# EAGLE board Board (EAGLE 9.7.0)
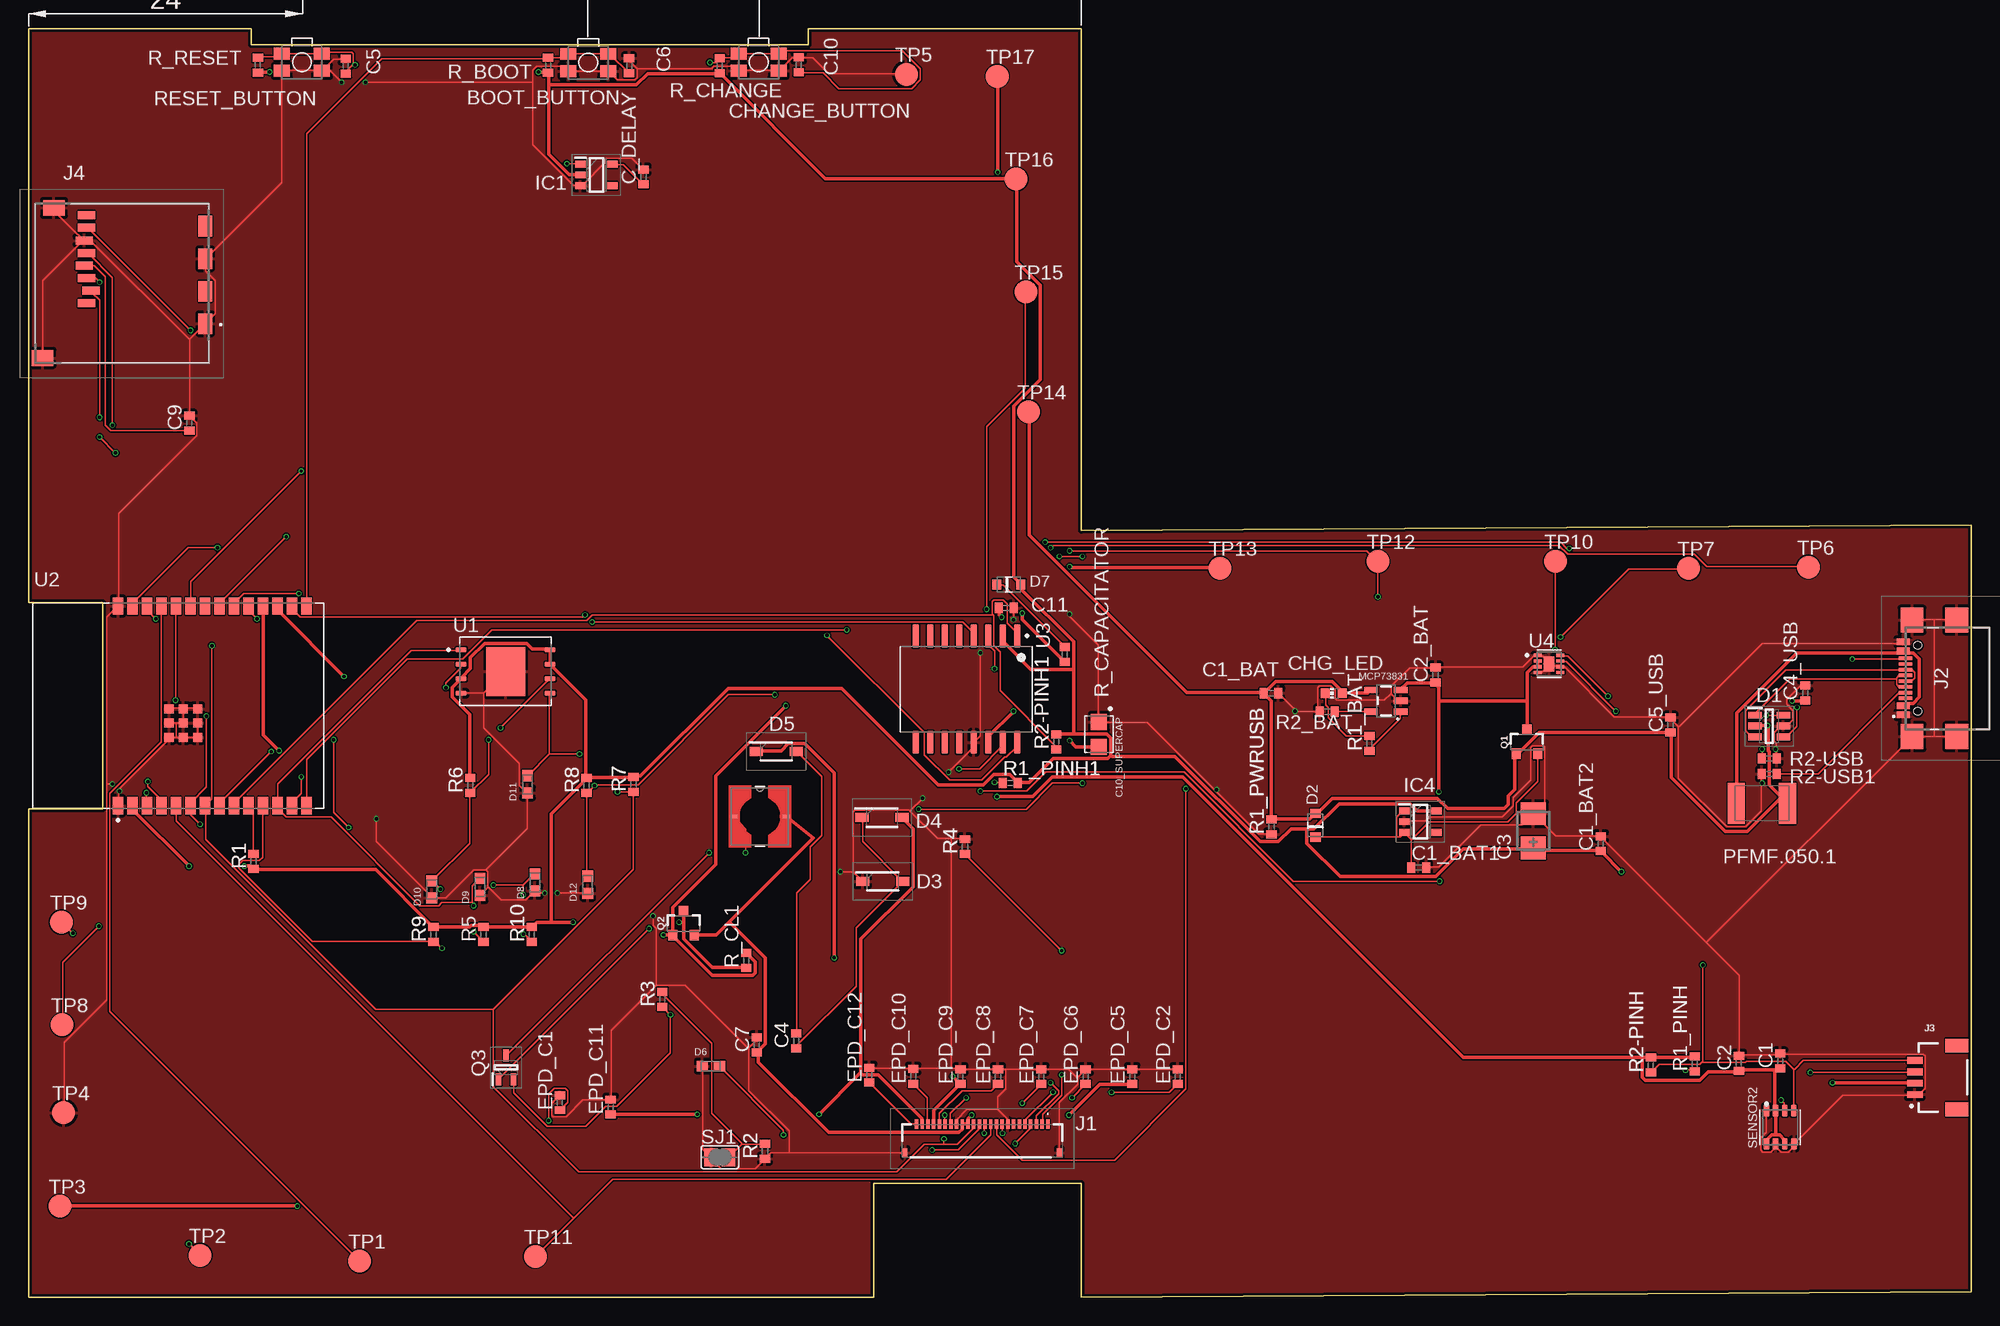
[diagram p0: board, top side]
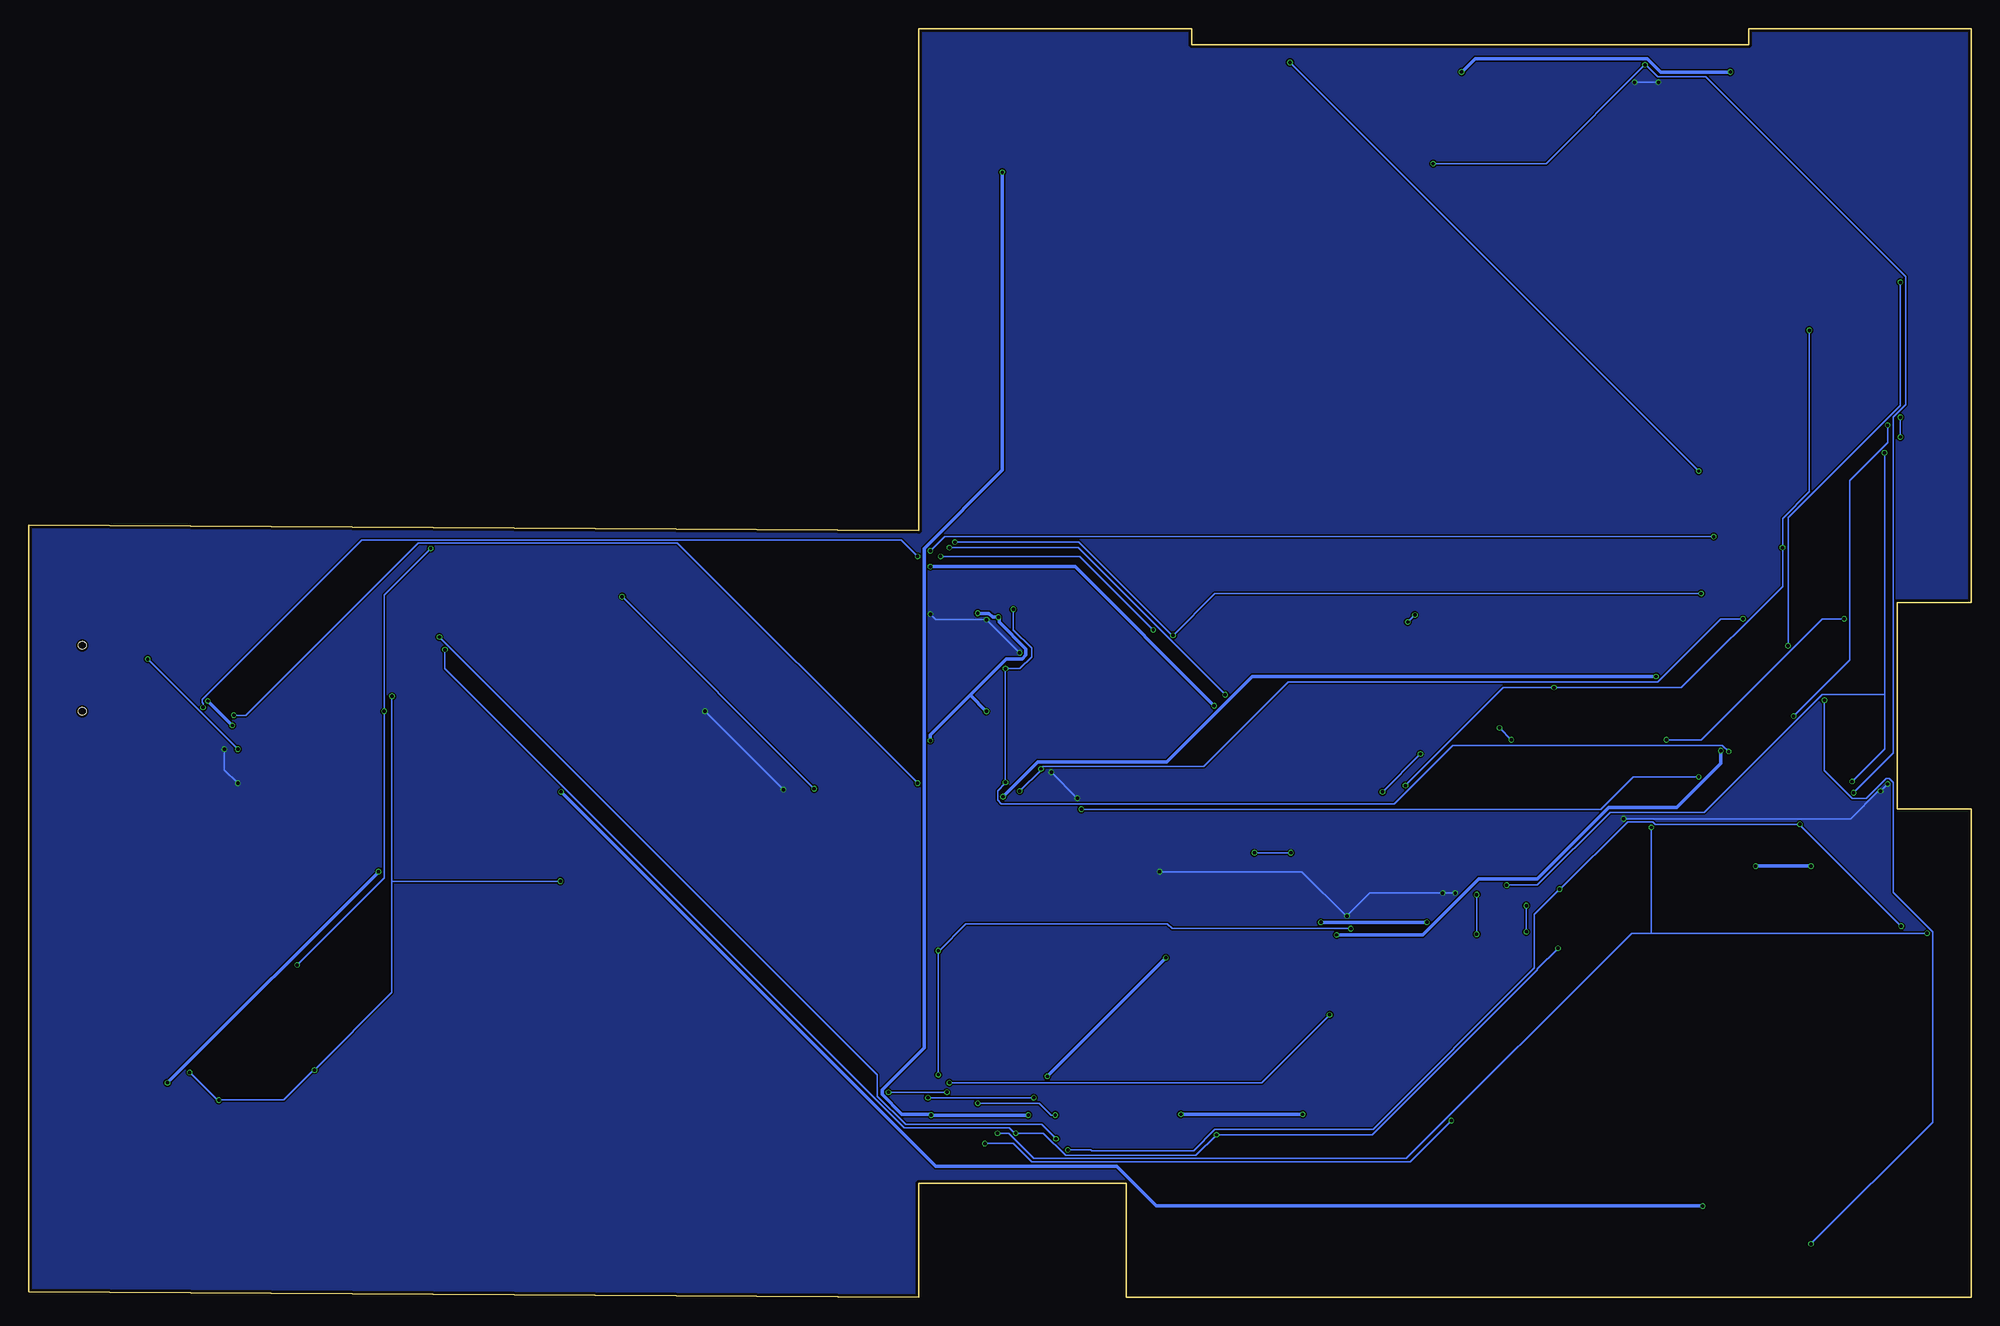
[diagram p1: board, bottom side, seen from below]

Size 170.2 x 111.2 mm. Coordinates in mm from the lower left corner, seen from the top.
Outline: 0,111.2 19.5,111.2 19.5,109.8 68.3,109.8 68.3,111.2 92.2,111.2 92.2,67.2 170.2,67.7 170.2,0.5 92.2,0 92.2,10 74.04,10 74.04,0 0,0 0,42.8 6.5,42.8 6.5,60.9 0,60.9 0,111.2
Copper layers (1*16): Top 0.035mm / dielectric 1.6mm / Bottom 0.035mm
Design rules "jlcpcb-2layers.dru": minimum track width 0.15mm, minimum drill 0.3mm, track to track 5mil, track to pad 5mil, pad to pad 5mil, via to via 5mil, smd to smd 5mil, copper to edge 0.2mm, drill to drill 6mil, minimum pad ring 10mil, minimum via ring 3mil, stop-mask expansion 4mil, vias tented up to drill 0mil, thermal gap 10mil
Net classes: 1 TSC: width 0.3 mm

## Footprints (pad centres in the part's own frame; a part is rotated, then mirrored left to right if it is on the bottom)
MYBUTTON = smd 1.4 x 1.05: 1 1.75,0.75; 2 -1.75,0.75; 3 -1.75,-0.75; 4 1.75,-0.75
EAGLE-LTSPICE_C0402 = smd 0.7 x 0.9: 1 -0.65,0; 2 0.65,0
ESP32_WROVER_EAGLE-LTSPICE_C0402 = smd 0.7 x 0.9: 1 -0.65,0; 2 0.65,0
RCL_CT3528 = smd 2 x 2.2: + -1.5,0; - 1.5,0
CAPCP3225X100N = smd 1.4 x 1.4: 1 -1.1,0; 2 1.1,0
ADAFRUIT_CHIP-LED0603 = smd 0.8 x 0.8: A 0,-0.75; C 0,0.75
SOT95P280X145-6N = smd 1.2 x 0.6: 1 -1.25,0.95; 2 -1.25,0; 3 -1.25,-0.95; 4 1.25,-0.95; 5 1.25,0; 6 1.25,0.95
ESP32_WROVER_AVX---SD0805S020S1R0_AVX_SD0805S020S1R0_0 = smd 0.8 x 0.9: 1 -1.05,0; 2 1.05,0
SOD3716X135N = smd 1.15 x 0.8: 1 -1.75,0; 2 1.75,0
DIOC1608X36N = smd 0.97 x 0.94: 1 -0.75,0; 2 0.75,0
SOT95P280X125-5N = smd 0.9 x 0.6: 1 -1.4,0.95; 2 -1.4,0; 3 -1.4,-0.95; 4 1.4,-0.95; 5 1.4,0.95
SOT95P280X120-5N = smd 0.9 x 0.6: 1 -1.4,0.95; 2 -1.4,0; 3 -1.4,-0.95; 4 1.4,-0.95; 5 1.4,0.95
FH34SRJ24S05SH99 = smd 0.3 x 0.8: 1 5.75,1.45; 2 5.25,1.45; 3 4.75,1.45; 4 4.25,1.45; 5 3.75,1.45; 6 3.25,1.45; 7 2.75,1.45; 8 2.25,1.45; 9 1.75,1.45; 10 1.25,1.45; 11 0.75,1.45; 12 0.25,1.45; 13 -0.25,1.45; 14 -0.75,1.45; 15 -1.25,1.45; 16 -1.75,1.45; 17 -2.25,1.45; 18 -2.75,1.45; 19 -3.25,1.45; 20 -3.75,1.45; 21 -4.25,1.45; 22 -4.75,1.45; 23 -5.25,1.45; 24 -5.75,1.45 | smd 0.4 x 0.8: MP1 6.75,-1.05; MP2 -6.75,-1.05
SAMACSYS_PARTS_USB4110GFA = smd 0.3 x 1.15: A1 -3.35,3.878; A4 -2.55,3.878; A5 -1.25,3.678; A6 -0.25,3.678; A7 0.25,3.678; A8 1.25,3.678; A9 2.55,3.878; A12 3.35,3.878; B1 3.05,3.878; B4 2.25,3.878; B5 1.75,3.678; B6 0.75,3.678; B7 -0.75,3.678; B8 -1.75,3.678; B9 -2.25,3.878; B12 -3.05,3.878 | smd 2.18 x 2: MP1 -5.11,-0.827; MP2 5.11,-0.827; MP3 -5.11,3.103; MP4 5.11,3.103 | hole 0.65: -2.89,2.603; 2.89,2.603
JST04_1MM_RA = smd 0.6 x 1.35: 1 -1.5,0; 2 -0.5,0; 3 0.5,0; 4 1.5,0 | smd 1.2 x 2: NC1 2.8,-3.675; NC2 -2.8,-3.675
112ATAARR03ATTEND = smd 1.8 x 1.2: G1 10.6,10.4; G2 4.9,10.4; S1 7.75,10.4; S2 2.05,10.4 | smd 1.4 x 1.9: G3 13.6,-3.85; G4 0.45,-2.85 | smd 0.7 x 1.5: P1 8.8,0; P2 7.7,0.4; P3 6.6,0; P4 5.5,-0.2; P5 4.4,0; P6 3.3,-0.2; P7 2.2,0; P8 1.1,0
IND_4828-WE-TPC_WRE = smd 0.61 x 0.305: 1 -2.286,0; 2 2.286,0
ESP32_WROVER_SPARKFUN-IC-POWER_SOT23-5 = smd 0.55 x 1.2: 1 -0.95,-1.3; 2 0,-1.3; 3 0.95,-1.3; 4 0.95,1.3; 5 -0.95,1.3
ESP32C6_VARISTOR_CT/CN1812 = smd 1.5 x 3.6: 1 -2.25,0; 2 2.25,0
ESP32_WROVER_SPARKFUN-DISCRETESEMI_SOT23-3 = smd 0.8 x 0.9: 1 -0.95,-1; 2 0.95,-1; 3 0,1.1
SOT65P210X110-3N = smd 1.05 x 0.5: 1 -1.05,0.65; 2 -1.05,-0.65; 3 1.05,0
ESP32_WROVER_EAGLE-LTSPICE_R0402 = smd 0.7 x 0.9: 1 -0.65,0; 2 0.65,0
ESP32_WROVER_BME680_PSON80P300X300X100-8N = smd 1.016 x 0.5: 1 1.458,1.2; 2 1.458,0.4; 3 1.458,-0.4; 4 1.458,-1.2; 5 -1.458,-1.22; 6 -1.458,-0.4; 7 -1.458,0.4; 8 -1.458,1.2
SJ = smd 1.168 x 1.6: 1 -0.762,0; 2 0.762,0
TP20R = smd 2 x 2: TP 0,0
SON127P600X800X80-9N = smd 0.94 x 0.44: 1 -3.895,1.905; 2 -3.895,0.635; 3 -3.895,-0.635; 4 -3.895,-1.905; 5 3.895,-1.905; 6 3.895,-0.635; 7 3.895,0.635; 8 3.895,1.905 | smd 3.4 x 4.3: 9 0,0
XCVR_ESP32-C6-WROOM-1-N8 = smd 1.5 x 0.9: 1 -8.75,5.26; 2 -8.75,3.99; 3 -8.75,2.72; 4 -8.75,1.45; 5 -8.75,0.18; 6 -8.75,-1.09; 7 -8.75,-2.36; 8 -8.75,-3.63; 9 -8.75,-4.9; 10 -8.75,-6.17; 11 -8.75,-7.44; 12 -8.75,-8.71; 13 -8.75,-9.98; 14 -8.75,-11.25; 15 8.75,-11.25; 16 8.75,-9.98; 17 8.75,-8.71; 18 8.75,-7.44; 19 8.75,-6.17; 20 8.75,-4.9; 21 8.75,-3.63; 22 8.75,-2.36; 23 8.75,-1.09; 24 8.75,0.18; 25 8.75,1.45; 26 8.75,2.72; 27 8.75,3.99; 28 8.75,5.26 | smd 0.8 x 0.8: 29_1 -2.755,0.79; 29_2 -1.505,0.79; 29_3 -0.255,0.79; 29_4 -2.755,-0.46; 29_5 -1.505,-0.46; 29_6 -0.255,-0.46; 29_7 -2.755,-1.71; 29_8 -1.505,-1.71; 29_9 -0.255,-1.71
SOIC127P1032X265-16N = smd 2.05 x 0.59: 1 -4.655,4.445; 2 -4.655,3.175; 3 -4.655,1.905; 4 -4.655,0.635; 5 -4.655,-0.635; 6 -4.655,-1.905; 7 -4.655,-3.175; 8 -4.655,-4.445; 9 4.655,-4.445; 10 4.655,-3.175; 11 4.655,-1.905; 12 4.655,-0.635; 13 4.655,0.635; 14 4.655,1.905; 15 4.655,3.175; 16 4.655,4.445
SON50P200X200X80-9N = smd 0.76 x 0.27: 1 -0.985,0.75; 2 -0.985,0.25; 3 -0.985,-0.25; 4 -0.985,-0.75; 5 0.985,-0.75; 6 0.985,-0.25; 7 0.985,0.25; 8 0.985,0.75 | smd 0.9 x 1.3: 9 0,0

## Placement (x,y rotation side)
BOOT_BUTTON  BUTTON_CUSYOMV1  [MYBUTTON]  49.03,108.22 180 top
C1  100nF  [EAGLE-LTSPICE_C0402]  153.45,20.73 90 top
C1_BAT  4.7uF  [EAGLE-LTSPICE_C0402]  108.84,52.95 0 top
C1_BAT1  4.7uF  [EAGLE-LTSPICE_C0402]  121.78,37.67 0 top
C1_BAT2  4.7uF  [ESP32_WROVER_EAGLE-LTSPICE_C0402]  137.72,39.77 90 top
C2  100nF  [EAGLE-LTSPICE_C0402]  149.83,20.53 90 top
C2_BAT  4.7uF  [ESP32_WROVER_EAGLE-LTSPICE_C0402]  123.25,54.55 90 top
C3  100uF TANT  [RCL_CT3528]  131.81,40.9 90 top
C4  4.7uF/25V  [ESP32_WROVER_EAGLE-LTSPICE_C0402]  67.25,22.49 90 top
C4_USB  100nF  [EAGLE-LTSPICE_C0402]  155.63,52.97 90 top
C5  1uF  [EAGLE-LTSPICE_C0402]  27.79,107.91 90 top
C5_USB  4.7uF  [EAGLE-LTSPICE_C0402]  143.84,50.17 90 top
C6  100nF  [EAGLE-LTSPICE_C0402]  52.61,107.93 90 top
C7  10uF  [EAGLE-LTSPICE_C0402]  63.8,22.13 90 top
C9  100nF  [ESP32_WROVER_EAGLE-LTSPICE_C0402]  14.09,76.63 90 top
C10  100nF  [EAGLE-LTSPICE_C0402]  67.47,108.03 90 top
C10_SUPERCAP  CPH3225A  [CAPCP3225X100N]  93.76,49.34 270 top
C11  100nF  [ESP32_WROVER_EAGLE-LTSPICE_C0402]  85.65,60.43 0 top
C_DELAY  100nF  [EAGLE-LTSPICE_C0402]  53.87,98.19 90 top
CHANGE_BUTTON  BUTTON_CUSYOMV1  [MYBUTTON]  63.96,108.25 180 top
CHG_LED  [ADAFRUIT_CHIP-LED0603]  114.34,52.95 90 top
D1  USBLC6-2SC6Y  [SOT95P280X145-6N]  152.48,50.07 0 top
D2  ESP32_WROVER_AVX---SD0805S020S1R0_AVX_SD0805S020S1R0_0_0AVX_SD0805S020S1R0_0_0  [ESP32_WROVER_AVX---SD0805S020S1R0_AVX_SD0805S020S1R0_0]  112.73,41.38 90 top
D3  MBR0530  [SOD3716X135N]  74.82,36.45 0 top
D4  MBR0530  [SOD3716X135N]  74.76,42.05 0 top
D5  MBR0530  [SOD3716X135N]  65.5,47.85 0 top
D6  PGB1010603MR  [DIOC1608X36N]  59.78,20.27 0 top
D7  ESP32_WROVER_AVX---SD0805S020S1R0_AVX_SD0805S020S1R0_0_0AVX_SD0805S020S1R0_0_0  [ESP32_WROVER_AVX---SD0805S020S1R0_AVX_SD0805S020S1R0_0]  85.88,62.48 0 top
D8  PGB1010603MR  [DIOC1608X36N]  44.36,36.37 90 top
D9  PGB1010603MR  [DIOC1608X36N]  39.54,35.97 90 top
D10  PGB1010603MR  [DIOC1608X36N]  35.32,35.77 90 top
D11  PGB1010603MR  [DIOC1608X36N]  43.7,44.97 90 top
D12  PGB1010603MR  [DIOC1608X36N]  48.98,36.17 90 top
EPD_C1  1uF/50V  [EAGLE-LTSPICE_C0402]  46.55,17.07 90 top
EPD_C2  1uF/50V  [EAGLE-LTSPICE_C0402]  100.68,19.35 90 top
EPD_C5  1uF/50V  [EAGLE-LTSPICE_C0402]  96.69,19.35 90 top
EPD_C6  1uF/50V  [EAGLE-LTSPICE_C0402]  92.6,19.35 90 top
EPD_C7  1uF/50V  [EAGLE-LTSPICE_C0402]  88.71,19.35 90 top
EPD_C8  1uF/50V  [EAGLE-LTSPICE_C0402]  84.92,19.35 90 top
EPD_C9  1uF/50V  [EAGLE-LTSPICE_C0402]  81.63,19.35 90 top
EPD_C10  1uF/50V  [EAGLE-LTSPICE_C0402]  77.51,19.39 90 top
EPD_C11  1uF/50V  [EAGLE-LTSPICE_C0402]  50.99,16.69 90 top
EPD_C12  1uF/50V  [EAGLE-LTSPICE_C0402]  73.65,19.49 90 top
IC1  BD5229G-TR  [SOT95P280X125-5N]  49.75,98.37 0 top
IC4  XC6220A331MR-G  [SOT95P280X120-5N]  121.93,41.69 0 top
J1  FH34SRJ-24S-0.5SH_99_  [FH34SRJ24S05SH99]  83.54,13.74 0 top
J2  SAMACSYS_PARTS_USB4110-GF-A  [SAMACSYS_PARTS_USB4110GFA]  168.1,54.26 90 top
J3  QWIIC_RIGHT_ANGLE  [JST04_1MM_RA]  165.25,19.28 90 top
J4  112A-TAAR-R03_ATTEND  [112ATAARR03ATTEND]  5.08,95.93 270 top
L1  68uH  [IND_4828-WE-TPC_WRE]  64.07,42.15 0 top
MCP73831  ESP32_WROVER_SPARKFUN-IC-POWER_MCP73831  [ESP32_WROVER_SPARKFUN-IC-POWER_SOT23-5]  118.91,52.29 90 top
PFMF.050.1  ESP32C6_VARISTORCN1812  [ESP32C6_VARISTOR_CT/CN1812]  151.84,43.3 0 top
Q1  20V/4.2A/52mΩ/1.4W  [ESP32_WROVER_SPARKFUN-DISCRETESEMI_SOT23-3]  131.26,48.66 0 top
Q2  20V/4.2A/52mΩ/1.4W  [ESP32_WROVER_SPARKFUN-DISCRETESEMI_SOT23-3]  57.38,32.76 0 top
Q3  SI1308EDL-T1-GE3  [SOT65P210X110-3N]  41.83,20.15 90 top
R1  10K  [ESP32_WROVER_EAGLE-LTSPICE_R0402]  19.71,38.21 90 top
R1_BAT  200  [ESP32_WROVER_EAGLE-LTSPICE_R0402]  117.46,48.55 90 top
R1_PINH  10K  [ESP32_WROVER_EAGLE-LTSPICE_R0402]  145.96,20.47 90 top
R1_PINH1  10K  [ESP32_WROVER_EAGLE-LTSPICE_R0402]  86.01,45.09 0 top
R1_PWRUSB  100K  [ESP32_WROVER_EAGLE-LTSPICE_R0402]  108.88,41.24 90 top
R2  2.2  [ESP32_WROVER_EAGLE-LTSPICE_R0402]  64.51,12.81 90 top
R2-PINH  10K  [ESP32_WROVER_EAGLE-LTSPICE_R0402]  142.12,20.37 90 top
R2-PINH1  10K  [ESP32_WROVER_EAGLE-LTSPICE_R0402]  90.03,48.69 90 top
R2-USB  5k1  [ESP32_WROVER_EAGLE-LTSPICE_R0402]  152.49,47.23 0 top
R2-USB1  5k1  [ESP32_WROVER_EAGLE-LTSPICE_R0402]  152.5,45.87 0 top
R2_BAT  2K  [ESP32_WROVER_EAGLE-LTSPICE_R0402]  113.78,51.33 0 top
R3  0.47  [ESP32_WROVER_EAGLE-LTSPICE_R0402]  55.52,26.13 90 top
R4  10K  [ESP32_WROVER_EAGLE-LTSPICE_R0402]  82.03,39.51 90 top
R5  10K  [ESP32_WROVER_EAGLE-LTSPICE_R0402]  39.85,31.81 90 top
R6  10K  [ESP32_WROVER_EAGLE-LTSPICE_R0402]  38.7,44.87 90 top
R7  10K  [ESP32_WROVER_EAGLE-LTSPICE_R0402]  52.99,44.97 90 top
R8  10K  [ESP32_WROVER_EAGLE-LTSPICE_R0402]  48.88,44.87 90 top
R9  10K  [ESP32_WROVER_EAGLE-LTSPICE_R0402]  35.47,31.81 90 top
R10  10K  [ESP32_WROVER_EAGLE-LTSPICE_R0402]  44.09,31.81 90 top
R_BOOT  10K  [ESP32_WROVER_EAGLE-LTSPICE_R0402]  45.51,107.97 90 top
R_CAPACITATOR  15  [ESP32_WROVER_EAGLE-LTSPICE_R0402]  90.78,56.34 90 top
R_CHANGE  10K  [ESP32_WROVER_EAGLE-LTSPICE_R0402]  60.55,107.94 90 top
R_CL1  10K  [ESP32_WROVER_EAGLE-LTSPICE_R0402]  62.87,29.53 90 top
R_RESET  10K  [ESP32_WROVER_EAGLE-LTSPICE_R0402]  20.09,107.99 90 top
RESET_BUTTON  BUTTON_CUSYOMV1  [MYBUTTON]  23.95,108.25 180 top
SENSOR2  ESP32_WROVER_BME680_BME680  [ESP32_WROVER_BME680_PSON80P300X300X100-8N]  153.44,14.92 90 top
SJ1  [SJ]  60.56,12.29 0 top
TP1  TPTP20R  [TP20R]  29.01,3.19 0 top
TP2  TPTP20R  [TP20R]  15.03,3.69 0 top
TP3  TPTP20R  [TP20R]  2.75,7.99 0 top
TP4  TPTP20R  [TP20R]  3.07,16.19 0 top
TP5  TPTP20R  [TP20R]  76.89,107.19 0 top
TP6  TPTP20R  [TP20R]  155.91,63.99 0 top
TP7  TPTP20R  [TP20R]  145.43,63.89 0 top
TP8  TPTP20R  [TP20R]  2.95,23.89 0 top
TP9  TPTP20R  [TP20R]  2.87,32.89 0 top
TP10  TPTP20R  [TP20R]  133.76,64.51 0 top
TP11  TPTP20R  [TP20R]  44.39,3.59 0 top
TP12  TPTP20R  [TP20R]  118.21,64.51 0 top
TP13  TPTP20R  [TP20R]  104.36,63.91 0 top
TP14  TPTP20R  [TP20R]  87.61,77.61 0 top
TP15  TPTP20R  [TP20R]  87.36,88.11 0 top
TP16  TPTP20R  [TP20R]  86.51,98.01 0 top
TP17  TPTP20R  [TP20R]  84.86,107.01 0 top
U1  W25Q512JVEIQ  [SON127P600X800X80-9N]  41.79,54.86 0 top
U2  ESP32-C6-WROOM-1-N8  [XCVR_ESP32-C6-WROOM-1-N8]  13.1,51.84 90 top
U3  DS3231SN#  [SOIC127P1032X265-16N]  82.15,53.3 270 top
U4  MAX17048G+T10  [SON50P200X200X80-9N]  133.2,55.52 0 top

## Library data of the parts
BOOT_BUTTON CHANGE_BUTTON CHG_LED PFMF.050.1 RESET_BUTTON SJ1 TP1-TP17 = DeskAssistant v19 v1
C1 C1_BAT C1_BAT1 C1_BAT2 C2 C2_BAT C4 C4_USB C5 C5_USB C6 C7 C9-C11 C_DELAY EPD_C1 EPD_C2 EPD_C5-EPD_C12 = DeskAssistant v19 v1; SPICEMODEL: NONE; SPICEPREFIX: C
C3 = DeskAssistant v19 v1; SPICEPREFIX: C
C10_SUPERCAP = DeskAssistant v19 v1; AVAILABILITY: Not in stock; CHECK_PRICES: https://www.snapeda.com/parts/CPH3225A/Seiko+Instruments/view-part/?ref=eda; DESCRIPTION: 11 mF (EDLC) Supercapacitor 3.3 V 1210 (3225 Metric) - -; MF: Seiko Instruments; MP: CPH3225A; PACKAGE: 1210 Seiko; PRICE: None; PURCHASE-URL: https://www.snapeda.com/api/url_track_click_mouser/?unipart_id=562593&manufacturer=Seiko Instruments&part_name=CPH3225A&search_term=None; SNAPEDA_LINK: https://www.snapeda.com/parts/CPH3225A/Seiko+Instruments/view-part/?ref=snap
D1 = DeskAssistant v19 v1; AVAILABILITY: In Stock; CHECK_PRICES: https://www.snapeda.com/parts/USBLC6-2SC6Y/STMicroelectronics/view-part/?ref=eda; DESCRIPTION: 17V Clamp 5A (8/20µs) Ipp Tvs Diode Surface Mount SOT-23-6; MF: STMicroelectronics; MP: USBLC6-2SC6Y; PACKAGE: SOT-23-6 STMicroelectronics; PRICE: None; SNAPEDA_LINK: https://www.snapeda.com/parts/USBLC6-2SC6Y/STMicroelectronics/view-part/?ref=snap
D2 D7 = DeskAssistant v19 v1; CENTROID_NOT_SPECIFIED: No; DATASHEET: http://datasheets.avx.com/schottky.pdf; DIGIKEY_DESCRIPTION: DIODE SCHOTTKY 20V 1A 0805; DIGIKEY_PART_NUMBER: 478-7800-1-ND; LEAD_FREE: yes; MF: AVX; MOUSER_PART_NUMBER: 581-SD0805S020S1R0; PACKAGE: 0805 (2012 metric); PREFIX: D; ROHS: yes; TEMPERATURE_RANGE_HIGH: +125°C; TEMPERATURE_RANGE_LOW: -55°C
D3-D5 = DeskAssistant v19 v1; AVAILABILITY: In Stock; CHECK_PRICES: https://www.snapeda.com/parts/MBR0530/Onsemi/view-part/?ref=eda; DESCRIPTION: Diode Schottky 30 V 500mA Surface Mount SOD-123; MF: ON Semiconductor; MP: MBR0530; PACKAGE: SOD-123-2 ON Semiconductor; PRICE: None; PURCHASE-URL: https://www.snapeda.com/api/url_track_click_mouser/?unipart_id=179458&manufacturer=ON Semiconductor&part_name=MBR0530&search_term=None; SNAPEDA_LINK: https://www.snapeda.com/parts/MBR0530/Onsemi/view-part/?ref=snap
D6 D8-D12 = DeskAssistant v19 v1; AVAILABILITY: In Stock; CHECK_PRICES: https://www.snapeda.com/parts/PGB1010603MR/Littelfuse/view-part/?ref=eda; DESCRIPTION: 150V (Typ) Clamp - Ipp Tvs Diode Surface Mount 0603 (1608 Metric); MF: Littelfuse Inc.; MP: PGB1010603MR; PACKAGE: 0603 Littelfuse Inc.; PRICE: None; PURCHASE-URL: https://www.snapeda.com/api/url_track_click_mouser/?unipart_id=5659453&manufacturer=Littelfuse Inc.&part_name=PGB1010603MR&search_term=None; SNAPEDA_LINK: https://www.snapeda.com/parts/PGB1010603MR/Littelfuse/view-part/?ref=snap
IC1 = DeskAssistant v19 v1; DESCRIPTION: Voltage Detector with Adjustable Delay Time: CMOS processes are utilized to develop high precision, low current consumption CMOS reset ICs that allow arbitrary setting of the delay time. The extensive lineup includes both Nch Open Drain and CMOS output types in a wide range of detection voltages (from 2.3V to 6.0V, in 0.1V steps), enabling selection of the ideal solution based on customer requirements. In addition, the entire series is of course both lead-free and RoHS-compliant.; HEIGHT: 1.25mm; MANUFACTURER_NAME: ROHM Semiconductor; MANUFACTURER_PART_NUMBER: BD5229G-TR; MOUSER_PART_NUMBER: 755-BD5229G-TR; MOUSER_PRICE-STOCK: https://www.mouser.co.uk/ProductDetail/ROHM-Semiconductor/BD5229G-TR?qs=4kLU8WoGk0vvnhrrYwdszw%3D%3D
IC4 = DeskAssistant v19 v1; DESCRIPTION: LDO Voltage Regulators; HEIGHT: 1.2mm; MANUFACTURER_NAME: Torex; MANUFACTURER_PART_NUMBER: XC6220A331MR-G; MOUSER_PART_NUMBER: 865-XC6220A331MR-G; MOUSER_PRICE-STOCK: https://www.mouser.co.uk/ProductDetail/Torex-Semiconductor/XC6220A331MR-G?qs=AsjdqWjXhJ8ZSWznL1J0gg%3D%3D
J1 = DeskAssistant v19 v1; DESCRIPTION: 24 Position FFC, FPC Connector Contacts, Top and Bottom 0.020" (0.50mm) Surface Mount, Right Angle; HEIGHT: 1.1mm; MANUFACTURER_NAME: Hirose; MANUFACTURER_PART_NUMBER: FH34SRJ-24S-0.5SH(99); MOUSER_PART_NUMBER: 798-FH34SRJ24S05SH99; MOUSER_PRICE-STOCK: https://www.mouser.co.uk/ProductDetail/Hirose-Connector/FH34SRJ-24S-0.5SH99?qs=vcbW%252B4%252BSTIpKBl5ap9J8Fw%3D%3D
J2 = DeskAssistant v19 v1; DESCRIPTION: CONN USB 2.0 TYPE-C R/A SMT; HEIGHT: 3.26mm; MANUFACTURER_NAME: GCT (GLOBAL CONNECTOR TECHNOLOGY); MANUFACTURER_PART_NUMBER: USB4110-GF-A; MOUSER_PART_NUMBER: 640-USB4110-GF-A; MOUSER_PRICE-STOCK: https://www.mouser.co.uk/ProductDetail/GCT/USB4110-GF-A?qs=KUoIvG%2F9IlYiZvIXQjyJeA%3D%3D
J3 = DeskAssistant v19 v1; PROD_ID: CONN-13694
J4 = DeskAssistant v19 v1; DESCRIPTION: Micro SD Card Socket, Push-Push Type, Top Mount, SMT, H=1.83mm, 10u; HEIGHT: 1.9mm; MANUFACTURER_NAME: ATTEND; MANUFACTURER_PART_NUMBER: 112A-TAAR-R03 ATTEND
L1 = DeskAssistant v19 v1; COPYRIGHT: Copyright (C) 2024 Ultra Librarian. All rights reserved.; MANUFACTURER_PART_NUMBER: 744043680; MFR_NAME: Wurth Electronics
MCP73831 = DeskAssistant v19 v1; PROD_ID: IC-09995
Q1 Q2 = DeskAssistant v19 v1; PROD_ID: TRAN-14388
Q3 = DeskAssistant v19 v1; AVAILABILITY: In Stock; CHECK_PRICES: https://www.snapeda.com/parts/SI1308EDL-T1-GE3/Vishay+Siliconix/view-part/?ref=eda; DESCRIPTION: Si1308EDL-T1-GE3 N-channel MOSFET Transistor, 1.5 A, 30 V, 3-Pin SC-70 | Siliconix / Vishay SI1308EDL-T1-GE3; MF: Vishay Siliconix; MP: SI1308EDL-T1-GE3; PACKAGE: SOT-323 Vishay Semiconductor; PRICE: None; PURCHASE-URL: https://www.snapeda.com/api/url_track_click_mouser/?unipart_id=274603&manufacturer=Vishay Siliconix&part_name=SI1308EDL-T1-GE3&search_term=None; SNAPEDA_LINK: https://www.snapeda.com/parts/SI1308EDL-T1-GE3/Vishay+Siliconix/view-part/?ref=snap
R1 R1_BAT R1_PINH R1_PINH1 R1_PWRUSB R2 R2-PINH R2-PINH1 R2-USB R2-USB1 R2_BAT R3-R10 R_BOOT R_CAPACITATOR R_CHANGE R_CL1 R_RESET = DeskAssistant v19 v1; SPICEMODEL: NONE; SPICEPREFIX: R
SENSOR2 = DeskAssistant v19 v1; AVAILABILITY: Unavailable; DESCRIPTION: Integrated Environmental Unit; MF: Bosch Sensortec; MP: BME680; PACKAGE: LGA-8 Bosch Tools; PRICE: None
U1 = DeskAssistant v19 v1; AVAILABILITY: In Stock; CHECK_PRICES: https://www.snapeda.com/parts/W25Q512JVEIQ/Winbond+Electronics/view-part/?ref=eda; DESCRIPTION: FLASH - NOR Memory IC 512Mb (64M x 8) SPI - Quad I/O 133 MHz 8-WSON (8x6); MF: Winbond Electronics; MP: W25Q512JVEIQ; PACKAGE: Package; PRICE: None; SNAPEDA_LINK: https://www.snapeda.com/parts/W25Q512JVEIQ/Winbond+Electronics/view-part/?ref=snap
U2 = DeskAssistant v19 v1; AVAILABILITY: In Stock; CHECK_PRICES: https://www.snapeda.com/parts/ESP32-C6-WROOM-1-N8/Espressif+Systems/view-part/?ref=eda; DESCRIPTION: Multiprotocol Modules ESP32-C6 module, Wi-Fi 6 in 2.4 GHz band, Bluetooth 5, Zigbee 3.0 and Thread. ESP34-WROOM Compatible - ENGINEERING SAMPLE; MF: Espressif Systems; MP: ESP32-C6-WROOM-1-N8; PACKAGE: None; PRICE: None; SNAPEDA_LINK: https://www.snapeda.com/parts/ESP32-C6-WROOM-1-N8/Espressif+Systems/view-part/?ref=snap
U3 = DeskAssistant v19 v1; AVAILABILITY: In Stock; CHECK_PRICES: https://www.snapeda.com/parts/DS3231SN%23/Analog+Devices/view-part/?ref=eda; DESCRIPTION: Extremely Accurate I²C-Integrated RTC/TCXO/Crystal; MF: Analog Devices; MP: DS3231SN#; PACKAGE: SOIC-16 Maxim; PRICE: None; PURCHASE-URL: https://www.snapeda.com/api/url_track_click_mouser/?unipart_id=99048&manufacturer=Analog Devices&part_name=DS3231SN#&search_term=None; SNAPEDA_LINK: https://www.snapeda.com/parts/DS3231SN%23/Analog+Devices/view-part/?ref=snap
U4 = DeskAssistant v19 v1; AVAILABILITY: In Stock; CHECK_PRICES: https://www.snapeda.com/parts/MAX17048G+T10/Analog+Devices/view-part/?ref=eda; DESCRIPTION: 3µA 1-Cell/2-Cell Fuel Gauge with ModelGauge; MF: Analog Devices; MP: MAX17048G+T10; PACKAGE: TDFN-8 Maxim; PRICE: None; PURCHASE-URL: https://www.snapeda.com/api/url_track_click_mouser/?unipart_id=329239&manufacturer=Analog Devices&part_name=MAX17048G+T10&search_term=None; SNAPEDA_LINK: https://www.snapeda.com/parts/MAX17048G+T10/Analog+Devices/view-part/?ref=snap

## Nets
3V3 [TSC]: C1_BAT2.1 C3.+ D7.2 IC1.2 IC4.5 J3.2 Q2.3 R1.1 R1_PINH1.2 R2-PINH1.2 R5.2 R6.2 R7.2 R8.2 R9.2 R10.2 R_BOOT.1 R_CHANGE.1 R_CL1.1 R_RESET.1 TP16.TP U1.3 U1.7 U1.8 U2.2 U3.2
32KHZ: R2-PINH1.1 U2.9 U3.1
DN: D1.1 J2.A7 J2.B7
DP: D1.3 J2.A6 J2.B6
EPD_3V3 [TSC]: C7.1 EPD_C5.1 J1.15 J1.16 L1.2 Q2.2 TP17.TP
EPD_3V3_C [TSC]: Q2.1 R_CL1.2 TP13.TP U2.18
EPD_BUSY: J1.9 TP9.TP U2.26
EPD_CS: D6.2 J1.12 R9.1 TP10.TP U2.11
EPD_DC: J1.11 TP11.TP U2.5
EPD_RST: J1.10 TP12.TP U2.21
FLASH_CS: D9.2 R5.1 U1.1 U2.12
GDR: J1.2 Q3.1 R4.1
GND: BOOT_BUTTON.1 BOOT_BUTTON.2 C1.2 C1_BAT1.2 C1_BAT2.2 C1_BAT.2 C2.2 C2_BAT.2 C3.- C4_USB.2 C5.2 C5_USB.2 C6.2 C7.2 C9.2 C10.2 C10_SUPERCAP.1 C11.2 C_DELAY.2 CHANGE_BUTTON.1 CHANGE_BUTTON.2 D1.5 D3.1 D6.1 D8.1 D9.1 D10.1 D11.1 D12.1 EPD_C1.2 EPD_C2.2 EPD_C5.2 EPD_C6.2 EPD_C7.2 EPD_C8.2 EPD_C9.2 EPD_C10.2 EPD_C11.2 EPD_C12.2 IC1.3 IC4.2 J1.8 J1.17 J1.MP1 J1.MP2 J2.A1 J2.A12 J2.B1 J2.B12 J2.MP1 J2.MP2 J2.MP3 J2.MP4 J3.1 J4.G1 J4.G2 J4.G3 J4.G4 J4.P6 MCP73831.2 R1_PWRUSB.1 R2-USB1.1 R2-USB.2 R2.1 R2_BAT.1 R4.2 RESET_BUTTON.1 RESET_BUTTON.2 SENSOR2.1 SENSOR2.5 SENSOR2.7 SJ1.1 TP4.TP TP5.TP U1.4 U1.9 U2.1 U2.28 U2.29_1 U2.29_2 U2.29_3 U2.29_4 U2.29_5 U2.29_6 U2.29_7 U2.29_8 U2.29_9 U3.13 U4.1 U4.4 U4.6 U4.9
GPIO8: R1.2 U2.10
I2C_PW [TSC]: C1.1 C2.1 R1_PINH.2 R2-PINH.2 SENSOR2.2 SENSOR2.6 SENSOR2.8 U2.17
INT_RTC: R1_PINH1.1 TP15.TP U2.8 U3.3
IO/BOOT: BOOT_BUTTON.3 BOOT_BUTTON.4 C6.1 R_BOOT.2 U2.15
IO/CHANGE: C10.1 CHANGE_BUTTON.3 CHANGE_BUTTON.4 R_CHANGE.2 U2.23
MISO: D12.2 J4.P7 R8.1 TP6.TP U1.2 U2.27
MOSI: D11.2 J1.14 J4.P3 R7.1 TP7.TP U1.5 U2.7
N$1: C9.1 J4.P4
N$2: J2.A5 R2-USB1.2
N$3: J2.B5 R2-USB.1
N$5: C4.2 D5.2
N$7: C4.1 D3.2 D4.1
N$8: C1_BAT1.1 D2.1 IC4.1 IC4.3 Q1.2
N$9: MCP73831.1 R1_BAT.1
N$10: CHG_LED.C R1_BAT.2
N$11: C_DELAY.1 IC1.5
N$12: MCP73831.5 R2_BAT.2
N$13: EPD_C12.1 J1.24
N$14: EPD_C2.1 J1.5
N$16: EPD_C1.1 J1.4
N$17: EPD_C10.1 J1.22
N$18: D7.1 R_CAPACITATOR.2
N$21: EPD_C8.1 J1.20
N$23: EPD_C7.1 J1.19
N$25: EPD_C6.1 J1.18
PREVGH [TSC]: D5.1 EPD_C9.1 J1.21
PREVGL [TSC]: D4.2 EPD_C11.1 J1.23
RESE: J1.3 Q3.2 R3.1
RESE': R2.2 R3.2 SJ1.2
RESET: C5.1 IC1.1 R_RESET.2 RESET_BUTTON.3 RESET_BUTTON.4 U2.3
RTC_RST: U2.16 U3.4
RX: TP2.TP U2.24
SCK: D10.2 J1.13 J4.P5 R6.1 TP8.TP U1.6 U2.6
SCL: J3.4 R2-PINH.1 SENSOR2.4 U2.20 U3.16 U4.7
SDA: J3.3 R1_PINH.1 SENSOR2.3 U2.19 U3.15 U4.8
SRC: L1.1 Q3.3
SS_SD: D8.2 J4.P2 R10.1 U2.4
TX: TP1.TP U2.25
USB_D+: D1.4 U2.14
USB_D-: D1.6 U2.13
VBAT [TSC]: C2_BAT.1 MCP73831.3 Q1.3 TP3.TP U4.2 U4.3
VBUS [TSC]: C1_BAT.1 C4_USB.1 C5_USB.1 CHG_LED.A D1.2 D2.2 MCP73831.4 PFMF.050.1.2 Q1.1 R1_PWRUSB.2 TP14.TP
VRTC [TSC]: C10_SUPERCAP.2 C11.1 R_CAPACITATOR.1 U3.14
VUSB [TSC]: J2.A4 J2.A9 J2.B4 J2.B9 PFMF.050.1.1

## Tracks (layer width: path | path; a pad name or v marks a point on that pad's centre or on a via)
3V3  (via drill 0.3)
  Top 0.3: R8.2 48.89,45.55 52.98,45.55 R7.2 53.12,45.69 53.6,45.69 61.29,53.38 71.26,53.38 79.71,44.93 83.65,44.93 84.55,45.83 85.94,45.83 86.56,45.2 R1_PINH1.2 86.7,45.14 87.67,45.14 89.75,47.21 94.53,47.21 94.8,47.49 | R6.2 38.64,45.55 38.64,51.09 37.12,52.61 37.12,53.45 37.88,54.21 U1.3 37.95,54.35 38.71,55.11 38.71,56.08 39.96,57.32 43.63,57.32 44.11,56.84 45.57,56.84 U1.8 45.7,56.7 45.7,55.52 U1.7 45.77,55.38 48.82,52.34 48.82,45.69 R8.2 | 57.41,32.88 57.41,33.85 Q2.3 | 57.41,32.88 57.41,31.42 59.9,28.93 62.81,28.93 R_CL1.1 | v14.06,37.8 9.14,42.71 9.14,43.06 U2.2 | v18.91,37.8 19.46,37.8 19.6,37.66 R1.1 19.74,37.52 30.4,37.52 35.39,32.53 R9.2 35.52,32.46 38.64,32.46 38.78,32.6 39.68,32.6 39.82,32.46 R5.2 39.96,32.46 44.04,32.46 R10.2 44.18,32.53 44.53,32.88 45.77,32.88 | v56.99,32.88 57.41,32.88 | 45.77,32.88 v47.71,32.88 | 45.77,32.88 45.77,42.37 48.82,45.41 R8.2 | 45.57,106.28 45.57,107.25 R_BOOT.1 45.43,107.39 v44.67,107.39 | 45.57,106.28 45.57,100.19 47.37,98.39 48.34,98.39 IC1.2 | v21.12,107.39 20.15,107.39 R_RESET.1 | 45.57,106.28 53.25,106.28 54.22,107.25 60.52,107.25 R_CHANGE.1 60.66,107.18 69.8,98.04 86.49,98.04 TP16.TP 86.56,97.9 86.56,90.77 88.64,88.69 88.64,80.45 86.28,78.1 86.28,63.14 86.84,62.59 D7.2 86.98,62.45 86.98,62.03 91.55,57.46 91.55,55.04 | v158.03,18.82 165.23,18.82 J3.2 | v139.54,37.31 137.81,39.04 C1_BAT2.1 137.67,39.18 132.06,39.18 131.85,39.39 C3.+ 131.71,39.32 125.69,39.32 123.27,36.89 114.89,36.89 111.98,39.8 111.98,41.05 | 94.8,47.49 94.8,49.01 94.46,49.36 91.55,49.36 | 91.55,49.36 90.09,49.36 R2-PINH1.2
  Top 0.3: 91.55,49.36 91.55,55.04 | 111.98,41.05 110.59,41.05 109.48,39.94 107.89,39.94 100.41,47.42 94.94,47.42 94.8,47.49 | 111.98,41.05 112.6,41.05 114.82,43.27 121.05,43.27 121.67,42.64 123.27,42.64 IC4.5 | 91.55,55.04 87.81,55.04 85.39,57.46 85.39,57.95 U3.2
  Bottom 0.3: v18.91,37.8 v14.06,37.8 | v47.71,32.88 v56.99,32.88 | v21.12,107.39 27.21,107.39 28.39,108.57 43.49,108.57 v44.67,107.39 | v139.54,37.31 v158.03,18.82
32KHZ
  Top 0.15: 84.45,59.85 84.42,59.89 84.42,60.99 84.55,61.13 85.39,61.13 85.73,60.79 85.73,59.12 86.56,58.29 86.56,58.02 U3.1 | 84.45,59.85 84.55,59.75 84.55,57.12 85.11,56.56 85.11,53.17 90.03,48.25 R2-PINH1.1 | U2.9 18,43.13 18,43.34 34,59.33 48.89,59.33 49.38,59.82 84.42,59.82 84.45,59.85
DN
  Top 0.15: 163.64,54.21 163.64,54.28 163.84,54.48 164.4,54.48 J2.A7 | 163.64,54.21 163.64,53.72 163.84,53.52 164.4,53.52 J2.B7 | 163.64,54.21 154.29,54.21 151.24,51.16 151.24,51.02 D1.1
DP
  Top 0.15: J2.A6 164.47,54.07 165.02,54.07 165.23,54.28 165.23,54.76 165.02,54.97 164.47,54.97 J2.B6 164.4,54.97 153.94,54.97 150.41,51.44 150.41,49.64 150.9,49.15 151.17,49.15 D1.3
EPD_3V3  (via drill 0.3)
  Top 0.3: 61.39,32.91 68.74,40.26 L1.2 | 61.39,32.91 60.25,31.77 58.38,31.77 Q2.2 | 61.39,32.91 64.54,29.76 64.54,22.21 63.85,21.52 C7.1 63.92,21.38 63.92,20.62 70.08,14.46 81.51,14.46 81.78,14.73 81.78,15.08 J1.16 81.85,15.22 82.27,15.22 J1.15 82.34,15.36 82.34,15.7 v82.61,15.98 | v91.13,15.98 93.83,18.68 96.67,18.68 EPD_C5.1 | v84.9,98.6 84.9,106.98 TP17.TP
  Bottom 0.3: v82.61,15.98 v91.13,15.98 91.27,16.05 93.69,16.05 95.43,17.78 95.43,18.2 91.76,21.87 91.76,65.63 84.9,72.49 v84.9,98.6
EPD_3V3_C  (via drill 0.3)
  Top 0.3: R_CL1.2 63.64,29.42 63.64,28.45 63.43,28.24 59.9,28.24 56.44,31.7 Q2.1 | v21.95,47.91 20.57,49.29 20.57,60.58 U2.18 | v55.61,31.77 56.3,31.77 Q2.1 | v91.2,64.04 91.27,63.97 104.36,63.97 TP13.TP | v66.34,51.85 60.18,45.69 60.18,37.93 56.44,34.19 56.44,31.91 Q2.1
  Bottom 0.3: v21.95,47.91 21.95,46.8 25.83,42.92 31.79,42.92 38.02,36.69 43.14,36.69 48.06,31.77 v55.61,31.77 | v91.2,64.04 78.53,64.04 v66.34,51.85
EPD_BUSY  (via drill 0.3)
  Top 0.15: v85.32,14.39 85.32,15.15 J1.9 | v3.88,31.91 2.91,32.88 TP9.TP | v11.15,59.47 10.39,60.23 10.39,60.58 U2.26 | v26.73,48.88 26.73,42.5 v28.05,41.19
  Bottom 0.15: v85.32,14.39 84.35,14.39 82.13,12.17 49.51,12.17 29.78,31.91 28.05,31.91 | v3.88,31.91 28.05,31.91 | v11.15,59.47 13.09,59.47 23.68,48.88 v26.73,48.88 | 28.05,31.91 v28.05,41.19
EPD_CS  (via drill 0.3)
  Top 0.15: U2.11 20.5,43.06 20.5,38.56 20.22,38.28 18.77,38.28 18.42,37.93 18.42,37.66 24.86,31.22 35.46,31.22 R9.1 35.52,31.15 35.66,31.15 v36.22,30.59 | v83.72,14.39 83.72,15.15 J1.12 | v66.13,14.25 66.13,14.67 60.59,20.2 D6.2 | v133.72,56.77 133.72,64.46 TP10.TP
  Bottom 0.15: v133.72,56.77 133.72,55.11 93.49,14.87 84.28,14.87 83.79,14.39 v83.72,14.39 81.3,14.39 79.36,12.45 67.93,12.45 v66.13,14.25 52.49,14.25 38.02,28.72 38.02,28.79 v36.22,30.59
EPD_DC
  Top 0.15: 47.75,6.94 44.46,3.66 TP11.TP | 47.75,6.94 51.18,10.37 80.4,10.37 84.28,14.25 84.28,15.15 J1.11 | 47.75,6.94 12.95,41.74 12.95,43.06 U2.5
EPD_RST  (via drill 0.3)
  Top 0.15: v101.38,44.58 101.38,18.27 95.15,12.03 87.05,12.03 84.83,14.25 84.83,15.15 J1.10 | v118.21,61.41 118.21,64.46 TP12.TP 118.14,64.53 117.24,65.43 v91.2,65.43 | v22.58,66.67 16.76,60.86 16.76,60.65 U2.21
  Bottom 0.15: v118.21,61.41 v101.38,44.58 | v22.58,66.67 89.96,66.67 v91.2,65.43
FLASH_CS  (via drill 0.3)
  Top 0.15: v38.99,32.05 39.82,31.22 R5.1 | v38.99,34.33 38.99,34.47 38.85,34.61 | 38.85,34.61 38.85,36.06 39.47,36.69 D9.2 | U1.1 37.88,56.7 33.52,56.7 21.81,45 21.81,43.13 U2.12 21.81,43.06 21.81,42.85 22.58,42.09 26.52,42.09 34.28,34.33 35.94,34.33 36.22,34.61 38.85,34.61
  Bottom 0.15: v38.99,34.33 v38.99,32.05
GDR  (via drill 0.3)
  Top 0.15: v90.51,19.51 90.51,17.71 88.85,16.05 88.85,15.22 J1.2 | v90.51,30.39 82.06,38.83 R4.1 | v54.36,32.32 41.2,19.17 Q3.1
  Bottom 0.15: v90.51,19.51 v90.51,30.39 90.44,30.39 88.09,32.74 70.43,32.74 70.01,32.32 v54.36,32.32
GND  (via drill 0.3)
  Top 0.15: C_DELAY.2 53.81,98.87 52.84,99.84 50.62,99.84 50.48,99.7 50.48,99.43 48.54,97.49 48.41,97.49 IC1.3 48.34,97.49 47.71,97.49 44.18,101.02 44.18,106.49 | 53.32,107.67 52.63,108.36 52.63,108.57 C6.2 | 53.32,107.67 53.32,106.91 53.12,106.7 51.59,106.7 50.83,107.46 BOOT_BUTTON.2 50.76,107.46 47.3,107.46 BOOT_BUTTON.1 47.23,107.53 46.88,107.88 44.53,107.88 44.18,107.53 44.18,106.49 | TP5.TP 76.87,107.25 70.08,107.25 68.7,108.64 67.52,108.64 C10.2 67.45,108.64 66.89,108.64 65.72,107.46 CHANGE_BUTTON.2 65.65,107.53 62.26,107.53 CHANGE_BUTTON.1 62.19,107.53 61.84,107.88 60.04,107.88 59.83,107.67 53.32,107.67 | J4.P6 4.85,92.64 4.36,93.13 4.29,93.13 2.29,95.13 2.29,95.41 J4.G4 | J4.G3 1.25,82.39 1.25,89.11 4.78,92.64 J4.P6 | 12.95,50.33 13.5,50.33 U2.29_5 13.57,50.4 13.57,51.51 U2.29_6 | 12.95,50.33 12.33,50.33 U2.29_2 | U2.29_3 12.33,51.65 13.5,51.65 U2.29_6 | U2.29_9 14.75,51.65 13.57,51.65 U2.29_6 | 12.95,49.08 13.5,49.08 U2.29_4 13.57,49.08 14.75,49.08 U2.29_7 14.82,49.15 U2.29_8 | 12.95,49.08 12.33,49.08 U2.29_1 12.4,49.01 7.89,44.51 7.89,44.37 | 7.89,44.37 7.89,43.13 U2.1 | 12.95,49.08 12.95,50.33 | C5.2 27.77,108.5 26.73,108.5 25.76,107.53 RESET_BUTTON.2 | RESET_BUTTON.2 25.69,107.53 22.23,107.53 RESET_BUTTON.1 22.16,107.46 22.16,97.7 15.51,91.05 J4.G2 15.51,90.98 15.51,89.94 16.34,89.11 16.34,86.2 15.51,85.37 J4.G1 15.44,85.3 14.13,83.98 | 14.13,83.98 14.13,77.34 C9.2 14.13,77.27 14.75,76.64 14.75,75.54 7.89,68.68 7.89,60.65 U2.28 7.83,60.58 6.86,59.61 6.86,45 | 6.86,45 6.86,26.09 3.12,22.35 3.12,16.26 TP4.TP | 6.86,45 v7.34,45 | v7.96,44.37 7.89,44.37
  Top 0.15: J4.P6 4.92,92.57 5.47,92.57 14.06,83.98 14.13,83.98 | v29.5,106.49 44.18,106.49 | v27.42,106.49 26.11,107.81 RESET_BUTTON.2 | J2.B12 164.4,51.16 164.4,50.95 J2.A1 164.47,50.88 164.47,49.64 164.95,49.15 J2.MP3 | 166.96,49.15 165.02,49.15 J2.MP3 | 166.96,49.15 168.9,49.15 J2.MP1 | 166.96,59.4 165.02,59.4 J2.MP4 164.95,59.33 164.47,58.85 164.47,57.67 J2.A12 164.4,57.6 164.4,57.32 J2.B1 164.33,57.32 151.87,57.32 144.59,50.05 144.53,50.05 | 166.96,59.4 168.9,59.4 J2.MP2 | 166.96,59.4 166.96,49.15 | 111.08,51.37 113.08,51.37 R2_BAT.1 112.95,51.44 112.95,53.45 113.08,53.58 114.06,53.58 114.47,53.17 114.47,52.48 114.61,52.34 118.76,52.34 119.32,52.89 119.39,52.89 | 111.08,51.37 109.55,52.89 C1_BAT.2 | 119.39,52.89 119.39,53.58 120.98,55.18 123.2,55.18 C2_BAT.2 123.27,55.25 130.88,55.25 131.85,56.22 132.2,56.22 U4.1 132.27,56.22 132.61,56.22 133.31,55.52 U4.9 | 119.39,52.89 119.94,52.34 120.15,52.34 MCP73831.2 | 153.11,48.04 153.11,48.53 152.9,48.74 152.9,49.5 153.46,50.05 153.67,50.05 D1.5 153.8,50.05 154.01,50.05 154.57,50.61 154.57,51.44 154.01,51.99 154.01,52.41 155.19,53.58 155.6,53.58 C4_USB.2 | 153.11,48.04 153.11,47.28 R2-USB.2 | U4.4 132.27,54.83 132.61,54.83 133.24,55.45 U4.9 | U4.9 133.31,55.45 133.44,55.32 134.14,55.32 U4.6 134.21,55.25 134.55,55.25 138.92,50.88 143.83,50.88 C5_USB.2 143.83,50.75 144.53,50.05 | 151.8,45.07 151.8,42.64 150.41,41.26 148.75,41.26 144.53,45.48 144.53,50.05 | 151.8,45.07 151.8,45.83 R2-USB1.1 | v153.04,48.04 153.11,48.04 | v151.87,45.07 151.8,45.07 | SENSOR2.1 152.21,16.33 152.21,14.46 151.73,13.97 151.73,12.93 151.94,12.73 152.63,12.73 153.04,13.14 SENSOR2.7 153.04,13.42 153.04,13.21 153.53,12.73 154.15,12.73 154.63,13.21 154.63,13.42 SENSOR2.5 154.7,13.49 158.93,17.71 165.23,17.71 J3.1 165.3,17.78 165.58,17.78 166.13,18.34 166.13,21.17 165.99,21.31 153.46,21.31 C1.2 153.39,21.31 153.32,21.24 149.86,21.24 C2.2 149.86,21.31 149.86,28.24 146.98,31.11
  Top 0.15: C1_BAT1.2 122.43,37.73 123.54,37.73 127.21,41.4 130.81,41.4 131.78,42.37 C3.- | C3.- 131.85,42.37 133.79,40.43 137.67,40.43 C1_BAT2.2 137.74,40.36 146.98,31.11 | IC4.2 120.56,41.74 122.36,41.74 122.71,42.09 129.08,42.09 130.05,43.06 130.05,43.82 131.57,45.34 131.57,48.18 131.71,48.32 132.75,48.32 132.82,48.25 132.82,43.4 131.85,42.44 C3.- | 146.98,31.11 164.95,49.08 J2.MP3 | v86.28,59.4 86.28,60.37 C11.2 | v83.38,56.49 83.38,49.22 82.82,48.67 U3.13 82.75,48.6 82.75,48.18 v80.61,46.04 | 103.98,44.41 97.99,50.4 93.76,50.4 C10_SUPERCAP.1 93.69,50.47 93.69,57.19 91.2,59.68 v91.2,59.89 | 103.98,44.41 107.75,40.63 108.86,40.63 R1_PWRUSB.1 | 80.81,40.22 79.64,40.22 77.21,42.64 | 80.81,40.22 81.99,40.22 R4.2 | 77.21,42.64 77.14,42.71 72.37,42.71 72.23,42.57 72.23,37.31 | 72.23,37.31 73.06,36.48 D3.1 | 84.9,16.47 82.2,16.47 81.3,15.57 81.3,15.22 J1.17 | 84.9,16.47 85.73,15.64 85.73,15.22 J1.8 | EPD_C2.2 100.62,20 96.74,20 EPD_C5.2 96.67,20 92.66,20 EPD_C6.2 92.59,20 91.89,19.31 | EPD_C12.2 73.68,20.14 73.75,20.07 77.49,20.07 EPD_C10.2 77.56,20.07 80.81,20.07 | 91.89,19.31 91.89,18.68 90.3,17.09 90.3,12.73 J1.MP1 | 91.89,19.31 91.83,19.31 91.13,20 88.78,20 EPD_C7.2 88.64,20 85.59,20 | 85.59,20 84.97,20 EPD_C8.2 84.9,20 81.65,20 EPD_C9.2 81.58,20.07 80.81,20.07 | 84.9,16.47 84.9,17.57 85.59,18.27 85.59,20 | 80.81,20.07 80.81,40.22 | 77.21,42.64 v78.32,43.75 | 39.89,52.96 37.95,52.96 U1.4 | 39.89,52.96 41.76,54.83 U1.9 | 40.1,37.45 38.99,37.45 36.56,35.03 35.39,35.03 D10.1 35.32,35.09 30.47,39.94 v30.47,41.95 | 40.1,37.45 40.23,37.31 40.23,35.92 | 40.23,35.92 39.54,35.23 D9.1
  Top 0.15: 40.1,37.45 40.1,37.52 43.7,41.12 43.7,44.17 D11.1 43.63,44.23 43,44.86 43,46.8 39.89,49.91 39.89,52.96 | 40.23,35.92 40.3,35.92 41.41,34.82 43.56,34.82 44.32,35.58 D8.1 44.39,35.58 44.53,35.44 v45.22,35.44 | v46.33,35.44 48.96,35.44 D12.1 | D6.1 59.07,20.2 59.07,13 59.76,12.31 SJ1.1 59.83,12.24 59.83,12.1 60.66,11.27 63.64,11.27 64.47,12.1 R2.1 64.54,12.17 65.03,12.66 66.62,12.66 | EPD_C1.2 46.54,17.71 45.84,17.02 45.84,15.98 45.98,15.84 47.09,15.84 48.54,17.3 50.97,17.3 EPD_C11.2 51.04,17.37 51.04,23.39 54.98,27.34 | 66.62,12.66 76.73,12.66 J1.MP2 | 63.09,21.87 63.78,22.56 63.78,22.77 C7.2 | 63.09,21.87 63.09,18.13 66.62,14.6 66.62,12.66 | 54.98,27.34 57.55,27.34 63.02,21.87 63.09,21.87 | v54.71,33.43 54.71,32.6 54.98,32.32 54.98,27.34 | v71.12,37.31 72.23,37.31 | 103.98,44.41 v104.08,44.51 | v110.94,51.37 111.08,51.37
  Bottom 0.15: v7.34,45 v7.96,44.37 8.17,44.37 10.6,41.95 v30.47,41.95 | v27.42,106.49 v29.5,106.49 | v153.04,48.04 153.04,46.24 v151.87,45.07 | v83.38,56.49 v86.28,59.4 90.72,59.4 v91.2,59.89 | v78.32,43.75 v80.61,46.04 | v45.22,35.44 v46.33,35.44 52.7,35.44 v54.71,33.43 54.78,33.43 58.66,37.31 v71.12,37.31 | v104.08,44.51 v110.94,51.37
  pour Top: 6.56,42.76 6.54,42.74 6.52,42.72 0.08,42.72 0.08,0.08 73.92,0.08 73.92,10.02 73.94,10.04 73.96,10.06 73.98,10.08 92.22,10.08 92.24,10.06 92.26,10.04 92.28,10.02 92.28,0.08 170.12,0.58 170.12,67.62 92.22,67.12 92.22,67.12 92.2,67.12 92.19,67.12 92.19,67.12 92.18,67.12 92.17,67.13 92.16,67.14 92.16,67.14 92.16,67.14 92.15,67.15 92.14,67.16 92.14,67.16 92.14,67.16 92.13,67.17 92.12,67.18 92.12,67.18 92.12,67.18 92.12,67.2 92.12,67.21 92.12,67.21 92.12,111.12 68.38,111.12 68.38,109.78 68.36,109.76 68.34,109.74 68.32,109.72 19.48,109.72 19.46,109.74 19.44,109.76 19.42,109.78 19.42,111.12 0.08,111.12 0.08,60.98 6.52,60.98 6.54,60.96 6.56,60.94 6.58,60.92 6.58,42.78
  pour Bottom: 6.56,42.76 6.54,42.74 6.52,42.72 0.08,42.72 0.08,0.08 73.92,0.08 73.92,10.02 73.94,10.04 73.96,10.06 73.98,10.08 92.22,10.08 92.24,10.06 92.26,10.04 92.28,10.02 92.28,0.08 170.12,0.58 170.12,67.62 92.22,67.12 92.22,67.12 92.2,67.12 92.19,67.12 92.19,67.12 92.18,67.12 92.17,67.13 92.16,67.14 92.16,67.14 92.16,67.14 92.15,67.15 92.14,67.16 92.14,67.16 92.14,67.16 92.13,67.17 92.12,67.18 92.12,67.18 92.12,67.18 92.12,67.2 92.12,67.21 92.12,67.21 92.12,111.12 68.38,111.12 68.38,109.78 68.36,109.76 68.34,109.74 68.32,109.72 19.48,109.72 19.46,109.74 19.44,109.76 19.42,109.78 19.42,111.12 0.08,111.12 0.08,60.98 6.52,60.98 6.54,60.96 6.56,60.94 6.58,60.92 6.58,42.78
GPIO8
  Top 0.15: R1.2 19.67,38.9 19.67,42.71 19.32,43.06 U2.10
I2C_PW  (via drill 0.3)
  Top 0.3: 152.97,19.93 153.25,19.93 153.39,20.07 C1.1 | 152.97,19.93 149.86,19.93 C2.1 149.72,19.79 147.16,19.79 146.39,19.03 141.62,19.03 141.34,19.31 141.34,21.04 | 153.04,14.25 153.39,14.25 153.8,13.84 153.8,13.49 SENSOR2.6 | 153.04,14.25 152.7,14.25 152.28,13.84 152.28,13.49 SENSOR2.8 | 153.04,14.25 153.04,16.33 SENSOR2.2 152.97,16.47 152.97,19.93 | R1_PINH.2 145.91,21.11 145.84,21.04 142.17,21.04 R2-PINH.2 141.96,21.04 141.34,21.04 | v27.63,54.42 21.81,60.23 21.81,60.58 U2.17 | v84.83,43.89 87.95,43.89 89.68,45.62 101.11,45.62 125.69,21.04 141.34,21.04
  Bottom 0.3: v27.63,54.42 63.02,54.42 70.5,46.94 81.78,46.94 v84.83,43.89
INT_RTC  (via drill 0.3)
  Top 0.15: v84.62,45.14 85.32,45.14 R1_PINH1.1 | v84.62,55.11 84.62,56.63 84.07,57.19 84.07,57.95 U3.3 | v21.26,47.84 16.76,43.34 16.76,43.13 U2.8 | v83.93,60.3 83.93,76.3 87.32,79.69 87.32,88.07 TP15.TP
  Bottom 0.15: v21.26,47.84 21.81,48.39 45.43,48.39 50.55,43.27 84.97,43.27 85.32,43.61 85.32,44.37 84.62,45.07 v84.62,45.14 v84.62,55.11 83.38,55.11 82.34,56.15 82.34,56.91 83.93,58.5 v83.93,60.3
IO/BOOT
  Top 0.15: C6.1 52.56,107.32 50.97,108.92 50.83,108.92 BOOT_BUTTON.3 50.76,108.98 47.3,108.98 BOOT_BUTTON.4 47.23,108.92 46.95,108.64 45.57,108.64 R_BOOT.2 45.5,108.57 30.95,108.57 24.38,101.99 24.38,60.65 U2.15
IO/CHANGE  (via drill 0.3)
  Top 0.15: C10.1 67.52,107.32 69.6,107.32 70.98,105.94 77.35,105.94 78.11,106.7 78.11,107.67 76.52,109.26 65.93,109.26 65.72,109.05 CHANGE_BUTTON.3 65.65,108.98 62.26,108.98 CHANGE_BUTTON.4 62.19,108.98 61.84,108.64 60.59,108.64 R_CHANGE.2 60.52,108.57 60.18,108.22 v59.69,108.22 | v23.89,72.42 14.2,62.73 14.2,60.65 U2.23
  Bottom 0.15: v59.69,108.22 v23.89,72.42
MISO  (via drill 0.3)
  Top 0.15: 48.89,44.17 48.89,37.03 48.96,36.96 D12.2 | v36.56,53.45 36.56,53.86 37.88,55.18 37.88,55.45 U1.2 | 48.89,44.17 v49.58,44.86 49.58,44.93 53.39,44.93 61.29,52.82 v65.37,52.82 | 48.89,44.17 R8.1 | v16.55,65.7 13.99,65.7 9.14,60.86 9.14,60.65 U2.27 | v14.2,84.75 5.26,93.68 5.12,93.68 J4.P7 | v89.54,65.7 89.75,65.91 134.07,65.91 134.83,65.15 145.91,65.15 147.02,64.04 155.88,64.04 TP6.TP
  Bottom 0.15: v49.58,44.86 41,53.45 v36.56,53.45 25.41,53.45 16.55,62.31 v16.55,65.7 16.55,68.27 14.2,70.62 v14.2,84.75 | v89.54,65.7 78.25,65.7 v65.37,52.82
MOSI  (via drill 0.3)
  Top 0.15: 45.64,47.63 45.64,52.89 U1.5 | 45.64,47.63 43.77,45.76 D11.2 | 80.19,13.42 78.46,13.42 76.04,11 48.2,11 40.72,18.47 40.72,25.26 | 80.19,13.42 81.37,13.42 82.75,14.8 82.75,15.15 J1.14 | 40.72,25.26 52.98,37.52 52.98,44.31 R7.1 52.91,44.31 v51.59,44.31 | 40.72,25.26 30.4,25.26 15.51,40.15 15.51,43.06 U2.7 15.51,43.13 16.07,43.68 v16.07,57.12 | v6.23,88.97 5.89,89.32 5.12,89.32 J4.P3 | v134.21,57.88 140.16,63.83 145.43,63.83 TP7.TP | 80.19,13.42 v80.19,13.9 | v48.27,47.63 45.64,47.63
  Bottom 0.15: v6.23,88.97 6.23,78.17 16.07,68.33 v16.07,57.12 | v134.21,57.88 95.84,19.51 95.84,17.64 93.35,15.15 81.44,15.15 v80.19,13.9 | v51.59,44.31 v48.27,47.63
N$1
  Top 0.15: C9.1 14.06,75.95 7.2,75.95 6.72,76.44 6.72,89.46 5.75,90.43 4.92,90.43 J4.P4
N$2
  Top 0.15: R2-USB1.2 153.18,45.9 156.78,45.9 163.84,52.96 164.4,52.96 J2.A5
N$3  (via drill 0.3)
  Top 0.15: v151.87,48.04 151.87,47.28 R2-USB.1 | v159.76,55.94 164.33,55.94 164.4,56.01 J2.B5
  Bottom 0.15: v159.76,55.94 v151.87,48.04
N$5
  Top 0.15: C4.2 67.31,23.18 67.31,35.44 68.49,36.62 68.49,39.49 69.03,40.03 69.47,40.48 69.47,40.52 69.49,40.54 69.47,40.67 69.47,45.67 67.31,47.84 D5.2
N$7
  Top 0.15: C4.1 67.31,21.87 67.31,22.08 72.5,27.27 72.5,32.39 76.52,36.41 D3.2 76.52,36.48 73.06,39.94 73.06,42.02 D4.1
N$8
  Top 0.15: 121.12,40.15 121.12,37.73 C1_BAT1.1 | 121.12,40.15 120.56,40.7 IC4.3 120.5,40.7 120.15,40.36 119.87,40.36 | 119.87,40.36 112.74,40.36 D2.1 | 119.87,40.36 119.87,42.09 120.36,42.57 120.5,42.57 IC4.1 | Q1.2 132.2,47.63 132.2,45.2 130.33,43.34 130.33,42.44 129.57,41.67 122.71,41.67 121.19,40.15 121.12,40.15
N$9
  Top 0.15: R1_BAT.1 117.52,47.91 117.52,48.11 120.15,50.75 120.15,51.3 MCP73831.1
N$10
  Top 0.15: CHG_LED.C 113.64,52.89 113.64,51.92 113.85,51.71 113.85,50.81 115.44,49.22 117.45,49.22 R1_BAT.2
N$11
  Top 0.15: IC1.5 51.18,99.29 52.08,99.29 53.81,97.56 C_DELAY.1
N$12
  Top 0.15: R2_BAT.2 114.47,51.37 117.59,51.37 MCP73831.5
N$13
  Top 0.15: J1.24 77.77,15.22 77.28,15.22 73.68,18.82 EPD_C12.1
N$14  (via drill 0.3)
  Top 0.15: v89.75,17.99 87.32,15.57 87.32,15.22 J1.5 | v94.87,17.99 99.93,17.99 100.62,18.68 EPD_C2.1
  Bottom 0.15: v94.87,17.99 v89.75,17.99
N$16  (via drill 0.3)
  Top 0.15: v86.42,13.49 87.74,14.8 87.74,15.15 J1.4 | v45.57,15.5 45.57,17.85 46.05,18.34 47.02,18.34 47.23,18.13 47.23,17.09 46.6,16.47 EPD_C1.1
  Bottom 0.15: v86.42,13.49 83.93,13.49 82.34,11.89 49.17,11.89 v45.57,15.5
N$17
  Top 0.15: J1.22 78.74,15.22 78.74,17.51 77.56,18.68 EPD_C10.1
N$18
  Top 0.15: D7.1 84.83,62.45 85.39,62.45 90.79,57.05 R_CAPACITATOR.2
N$21
  Top 0.15: J1.20 79.78,15.22 79.78,16.12 81.78,18.13 84.35,18.13 84.9,18.68 EPD_C8.1
N$23  (via drill 0.3)
  Top 0.15: v80.26,15.98 80.26,15.22 J1.19 | v87.05,17.02 88.71,18.68 EPD_C7.1
  Bottom 0.15: v80.26,15.98 80.61,15.98 81.65,17.02 v87.05,17.02
N$25  (via drill 0.3)
  Top 0.15: v82.13,17.51 80.75,16.12 80.75,15.22 J1.18 | v91.41,17.51 92.59,18.68 EPD_C6.1
  Bottom 0.15: v91.41,17.51 v82.13,17.51
PREVGH  (via drill 0.3)
  Top 0.3: J1.21 79.29,15.22 79.29,16.4 81.58,18.68 EPD_C9.1 81.51,18.82 v80.95,19.37 | v70.57,29.76 70.57,45.97 68,48.53 66.55,48.53 65.93,47.91 63.78,47.91 D5.1
  Bottom 0.3: v80.95,19.37 v70.57,29.76
PREVGL  (via drill 0.3)
  Top 0.3: 72.92,19.65 73.06,19.51 74.44,19.51 78.25,15.7 78.25,15.22 J1.23 | 72.92,19.65 72.92,31.42 77.49,35.99 77.49,41.05 76.52,42.02 D4.2 | v58.59,16.05 51.04,16.05 EPD_C11.1 | v69.25,16.05 72.78,19.58 72.92,19.65
  Bottom 0.3: v69.25,16.05 v58.59,16.05
RESE  (via drill 0.3)
  Top 0.15: v89.54,18.82 90.23,18.13 90.23,17.85 88.29,15.91 88.29,15.22 J1.3 | R3.1 55.54,25.47 v56.23,24.78 56.23,21.45 51.52,16.74 50.55,16.74 48.82,15.01 45.43,15.01 42.52,17.92 42.52,19.1 Q3.2
  Bottom 0.15: v89.54,18.82 62.19,18.82 v56.23,24.78
RESE'
  Top 0.15: 62.46,13.42 64.47,13.42 R2.2 | 62.46,13.42 61.35,12.31 SJ1.2 | R3.2 55.54,26.72 55.54,26.58 59.83,22.28 59.83,16.12 62.46,13.49 62.46,13.42
RESET  (via drill 0.3)
  Top 0.15: R_RESET.2 20.15,108.71 21.88,108.71 22.16,108.98 RESET_BUTTON.4 22.23,108.98 25.69,108.98 RESET_BUTTON.3 25.76,109.05 25.83,109.12 28.32,109.12 28.46,108.98 28.46,108.08 | 28.46,108.08 27.84,107.46 27.84,107.32 C5.1 | v47.16,99.36 48.34,99.36 IC1.1 | v28.6,108.01 28.53,108.08 28.46,108.08 | v10.32,44.23 10.32,43.13 U2.3
  Bottom 0.15: v47.16,99.36 37.26,99.36 v28.6,108.01 28.53,108.01 27.49,106.98 23.27,106.98 5.75,89.46 5.75,78.24 6.86,77.13 6.86,47.7 v10.32,44.23
RTC_RST  (via drill 0.3)
  Top 0.15: v48.75,59.82 48.54,59.61 23.82,59.61 23.13,60.3 23.13,60.58 U2.16 | v49.38,59.19 81.85,59.19 82.75,58.29 82.75,58.02 U3.4
  Bottom 0.15: v49.38,59.19 v48.75,59.82
RX  (via drill 0.3)
  Top 0.15: v12.88,52.34 12.88,60.58 U2.24 | v14.06,4.69 15.03,3.72 TP2.TP
  Bottom 0.15: v12.88,52.34 12.88,46.17 10.46,43.75 9.21,43.75 7.48,45.48 7.2,45.48 6.86,45.14 6.86,35.51 3.39,32.05 3.39,15.36 v14.06,4.69
SCK  (via drill 0.3)
  Top 0.15: v79.15,12.93 81.44,12.93 83.24,14.73 83.24,15.15 J1.13 | v36.08,35.79 35.39,36.48 D10.2 35.39,36.55 38.64,39.8 38.64,44.17 R6.1 38.71,44.23 40.3,45.83 v40.3,48.88 | v41.34,49.91 45.64,54.21 U1.6 | v15.03,41.47 14.2,42.3 14.2,43.06 U2.6 14.2,43.13 14.2,43.34 15.58,44.72 v15.58,50.95 | v7.34,76.44 7.34,89.39 5.26,91.46 5.12,91.46 J4.P5 | v6.16,32.53 2.98,29.35 2.98,23.95 TP8.TP
  Bottom 0.15: v79.15,12.93 77.14,12.93 77.08,12.87 68.14,12.87 66.27,14.73 52.42,14.73 38.3,28.86 38.3,33.57 v36.08,35.79 36.01,35.79 30.12,41.67 27.91,41.67 27.7,41.47 v15.03,41.47 15.03,41.4 v6.16,32.53 | v40.3,48.88 v41.34,49.91 | v7.34,76.44 7.34,74.91 10.66,71.59 10.66,55.87 v15.58,50.95
SCL  (via drill 0.3)
  Top 0.15: v139.05,51.37 134.69,55.73 134.21,55.73 U4.7 | 146.67,20.69 v146.67,29.14 | 146.67,20.69 146.39,20.41 142.86,20.41 142.17,19.72 R2-PINH.1 | 154.63,20 154.63,16.4 SENSOR2.4 | 154.63,20 153.94,20.69 150.48,20.69 150.41,20.62 146.67,20.62 146.67,20.69 | J3.4 165.23,20.76 155.47,20.76 154.7,20 154.63,20 | v23.68,61.69 18.84,61.69 18,60.86 18,60.65 U2.20 | v69.94,58.02 78.46,49.5 78.46,47.56 80.68,45.34 83.52,45.34 85.52,47.35 85.66,47.35 86.56,48.25 86.56,48.6 U3.16 | v134.97,65.63 134.76,65.63 134.21,66.19 v89.06,66.19
  Bottom 0.15: v146.67,29.14 139.05,36.76 v139.05,51.37 139.05,61.55 v134.97,65.63 | v23.68,61.69 66.27,61.69 v69.94,58.02 70.01,58.02 78.18,66.19 v89.06,66.19
SDA  (via drill 0.3)
  Top 0.15: v138.36,52.68 134.83,56.22 134.21,56.22 U4.8 | v145.15,19.93 145.84,19.93 145.91,19.86 R1_PINH.1 | v153.53,17.3 153.8,17.02 153.8,16.4 SENSOR2.3 | v156.09,19.72 165.23,19.72 J3.3 | v20.01,59.47 19.32,60.16 19.32,60.58 U2.19 | v81.51,46.31 83.31,46.31 85.32,48.32 85.32,48.6 U3.15 | v123.61,36.48 110.8,36.48 101.24,46.04 89.12,46.04 87.46,44.37 v83.38,44.37
  Bottom 0.15: 138.36,36.48 138.36,26.72 v145.15,19.93 145.22,19.93 147.85,17.3 v153.53,17.3 153.67,17.3 v156.09,19.72 | 138.36,36.48 v138.36,52.68 | v20.01,59.47 21.95,59.47 27.49,53.93 59.83,53.93 67.24,46.52 81.3,46.52 v81.51,46.31 81.51,46.24 v83.38,44.37 | v123.61,36.48 138.36,36.48
SRC  (via drill 0.3)
  Top 0.15: v59.62,38.97 41.9,21.24 Q3.3 | L1.1 62.81,41 v62.81,38.97
  Bottom 0.15: v62.81,38.97 v59.62,38.97
SS_SD  (via drill 0.3)
  Top 0.15: v43.35,31.84 43.42,31.84 44.04,31.22 R10.1 | 43.35,36.13 v43.35,35.3 | 43.35,36.13 44.32,37.1 D8.2 | v6.23,77.13 6.23,87.38 5.54,88.07 5.54,88.21 J4.P2 | v7.62,74.01 v6.23,75.4 | v10.46,45.2 10.46,44.79 11.63,43.61 11.63,43.13 U2.4 | v40.72,36.13 43.35,36.13
  Bottom 0.15: v43.35,35.3 v43.35,31.84 | v6.23,75.4 v6.23,77.13 | 7.62,52.82 7.62,48.04 v10.46,45.2 | 7.62,52.82 v7.62,74.01 | v40.72,36.13 38.02,36.13 31.65,42.5 23.41,42.5 13.09,52.82 7.62,52.82
TX
  Top 0.15: U2.25 11.63,60.58 11.63,48.67 7.13,44.17 7.13,25.05 28.95,3.24 TP1.TP
USB_D+  (via drill 0.3)
  Top 0.15: v154.91,51.71 154.91,50.05 154.01,49.15 153.74,49.15 D1.4 | v90.3,64.94 v92.31,64.94 | v71.67,58.5 40.58,58.5 38.02,55.94 33.17,55.94 24.38,47.14 24.38,43.13 U2.14
  Bottom 0.15: v154.91,51.71 154.91,52.06 154.98,52.13 154.98,52.41 140.99,66.4 93.76,66.4 v92.31,64.94 | v90.3,64.94 78.11,64.94 v71.67,58.5
USB_D-  (via drill 0.3)
  Top 0.15: v152.21,51.02 153.67,51.02 D1.6 | v92.31,45.07 89.68,45.07 87.39,42.78 v77.97,42.78 | v23.89,45.62 23.89,44.17 23.13,43.4 23.13,43.13 U2.13
  Bottom 0.15: v152.21,51.02 151.17,51.02 136.08,66.12 113.36,66.12 v92.31,45.07 | v77.97,42.78 32.48,42.78 29.64,45.62 v23.89,45.62
VBAT  (via drill 0.3)
  Top 0.3: U4.2 132.2,55.73 132.2,55.32 U4.3 132.06,55.25 131.78,55.25 131.3,54.76 131.3,52.27 | 131.3,52.27 131.3,49.78 Q1.3 | MCP73831.3 120.22,53.31 120.77,53.86 123.2,53.86 C2_BAT.1 123.27,53.72 123.54,53.45 123.54,52.27 | v23.55,8.02 2.77,8.02 TP3.TP | 123.54,52.27 v123.54,44.31 | 123.54,52.27 131.3,52.27
  Bottom 0.3: v23.55,8.02 71.4,8.02 74.86,11.48 90.72,11.48 v123.54,44.31
VBUS  (via drill 0.3)
  Top 0.3: v154.5,52.27 155.6,52.27 C4_USB.1 | D1.2 151.24,50.12 v152.35,50.12 152.42,49.98 152.42,47.91 152.49,47.84 152.49,44.93 154.08,43.34 PFMF.050.1.2 153.46,43.75 150.55,40.84 148.61,40.84 143.9,45.55 143.9,49.36 C5_USB.1 143.83,49.5 132.34,49.5 130.54,47.7 130.33,47.7 Q1.1 130.19,47.56 130.19,44.51 129.64,43.96 129.64,43.2 129.29,42.85 124.3,42.85 123.4,43.75 114.19,43.75 112.88,42.44 D2.2 112.67,42.37 112.25,41.95 108.93,41.95 R1_PWRUSB.2 108.86,42.09 108.86,52.27 108.31,52.82 C1_BAT.1 | MCP73831.4 117.59,53.24 117.31,52.96 115.09,52.96 CHG_LED.A 115.09,53.1 114.19,54 109.28,54 108.24,52.96 C1_BAT.1 | TP14.TP 87.67,77.54 87.67,66.81 101.45,53.03 108.1,53.03 C1_BAT.1
  Bottom 0.3: v152.35,50.12 v154.5,52.27
VRTC  (via drill 0.3)
  Top 0.3: v85.25,59.61 85.04,59.82 85.04,60.37 C11.1 | v87.05,59.96 87.05,59.4 90.72,55.73 R_CAPACITATOR.1 | v91.2,48.81 91.76,48.25 93.69,48.25 C10_SUPERCAP.2 | v86.28,51.37 84.07,49.15 84.07,48.67 U3.14
  Bottom 0.3: v87.05,59.96 86.08,59.96 85.73,59.61 v85.25,59.61 85.18,59.47 85.18,59.19 82.82,56.84 82.82,56.29 83.17,55.94 84.55,55.94 87.7,52.79 | v91.2,48.81 91.2,49.29 87.7,52.79 | 87.7,52.79 v86.28,51.37
VUSB
  Top 0.3: J2.A4 164.4,51.71 164.4,51.99 J2.B9 164.54,52.06 165.09,52.06 165.65,52.61 165.65,55.94 165.09,56.49 164.54,56.49 J2.B4 | J2.B4 164.4,56.56 164.4,56.77 J2.A9 | J2.B4 164.26,56.49 154.91,56.49 149.65,51.23 149.65,43.34 PFMF.050.1.1